# Altium PCB LNBF.PcbDoc
Units mil, origin at the board's own origin, x right, y up, seen from the top; angles counter-clockwise.
Board outline 6000 x 4000 mil, 2 copper layers (Top Layer, Bottom Layer); 9 components, 8 nets, 45 pads, 8 vias.
Unrouted connection lines stored in the file: 10.
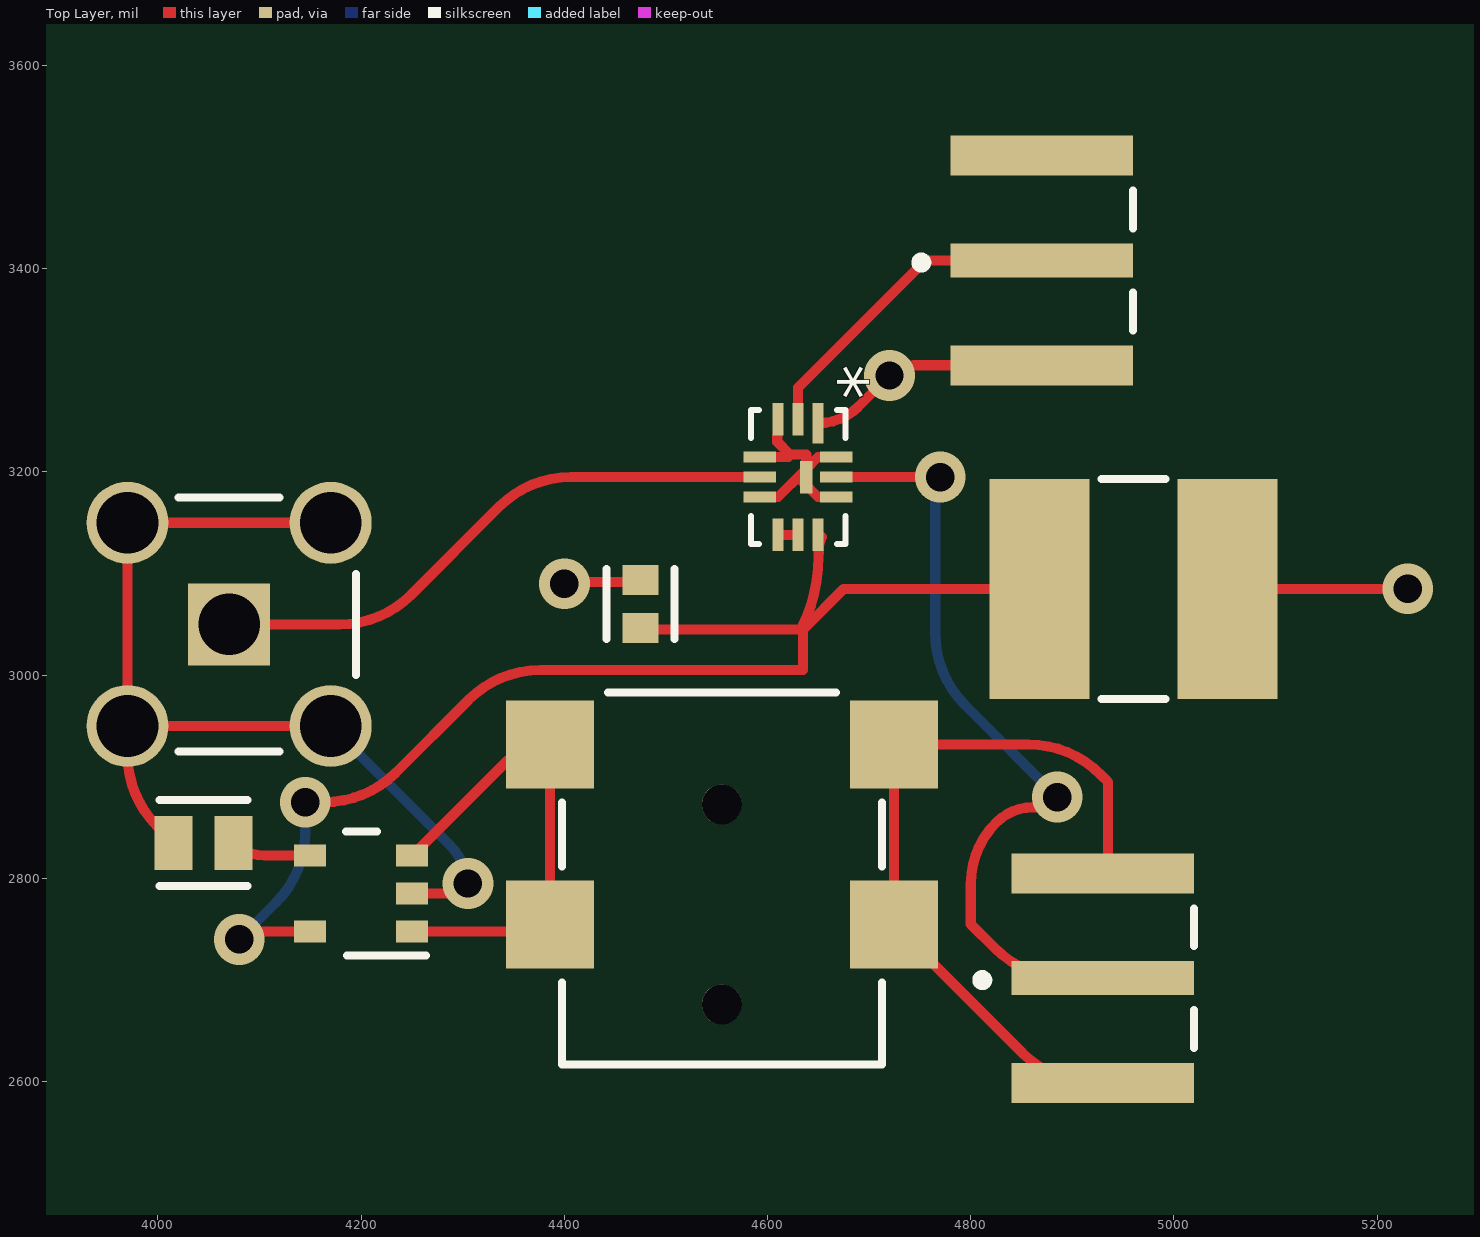
[diagram p0: Top Layer view]
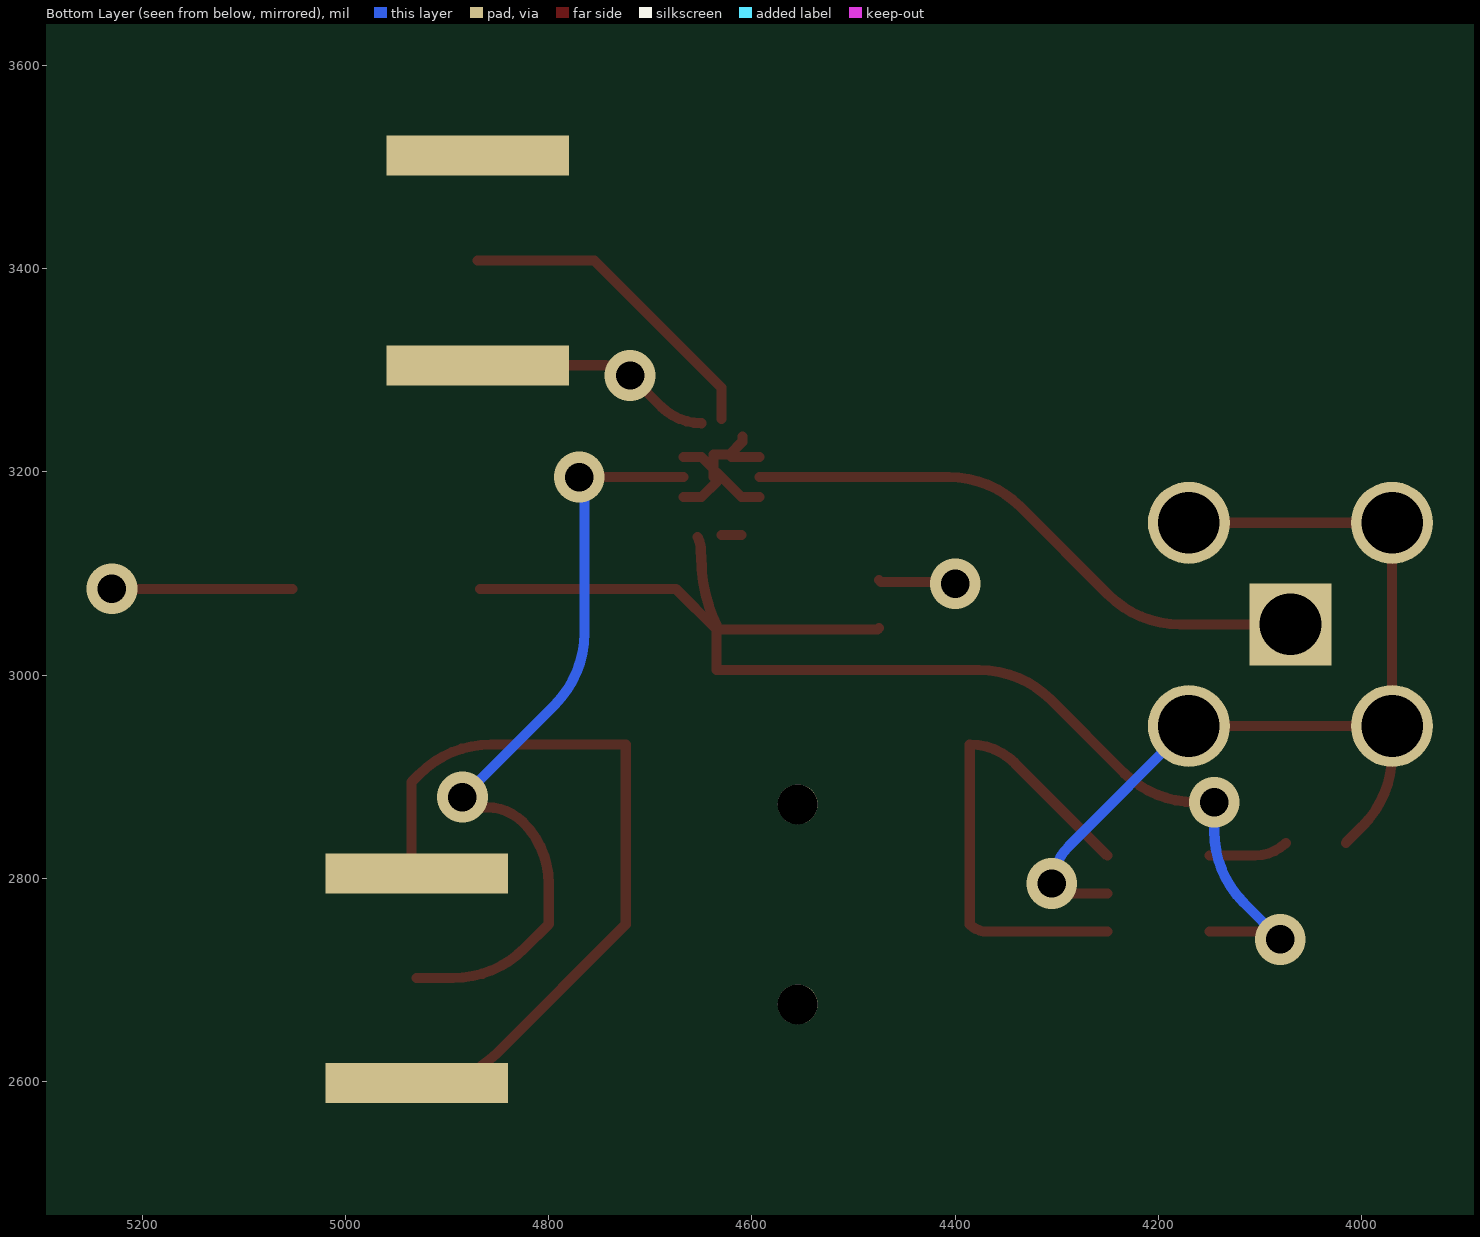
[diagram p1: Bottom Layer view, seen from below]
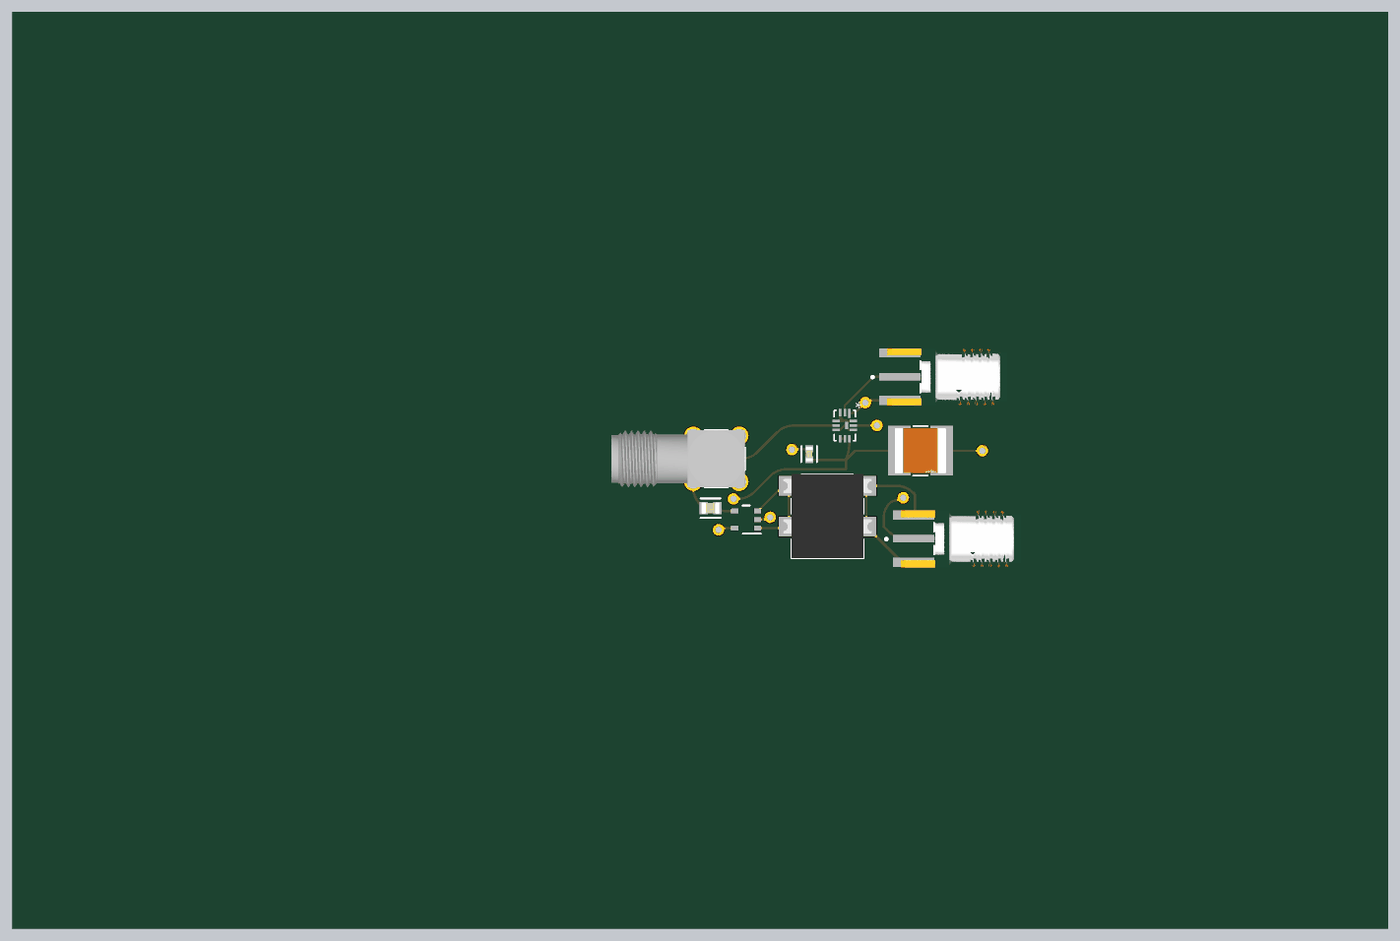
[diagram p2: 3D render of the assembled board from above, using the file's embedded part models]

## Layer stack, top to bottom
Top Solder: solder mask 0.4, Solder Resist, Dk 3.5
Top Layer: signal copper 1.4
Dielectric 1: dielectric 12.6, FR-4, Dk 4.8
Bottom Layer: signal copper 1.4
Bottom Solder: solder mask 0.4, Solder Resist, Dk 3.5

## Board outline
1000,1000 7000,1000 7000,5000 1000,5000

## Design rules (kind name [scope] priority, off if disabled: settings)
Clearance [All] p1: gap=10 ignorepadtopadclearanceinfootprint=FALSE
PolygonConnect [All] p1: connectstyle=Relief reliefconductorwidth=10 reliefentries=4 polygonreliefangle="90 Angle" airgapwidth=10
RoutingVias [All] p1: holewidth=28 width=50 viastyle="Through Hole" minholewidth=28 minwidth=50 maxholewidth=28 maxwidth=50
SolderMaskExpansion [All] p1: expansion=4 istentingtop=FALSE
Width [All] p1: maxlimit=10 minlimit=10 preferedwidth=10
30 further rules are at their usual default settings.

## Classes and differential pairs
component class LNBF: U?

## Components (designator, comment, footprint, x,y, rotation, side; value= is the part's Value field where it differs from the comment)
C1 "C0805C103K2RACTU" FP-C0805C-DN-MFG 4045,2835 r180 top value="10,000 pF"
J1 "OUT" FP-EMPCB_SMAFSTJ_B_HT-MFG 5146.77,3408.15 r270 top
J2 "SMA IN" MOLX-731000114_V 4070,3050 r0 top
J3 "EMPCB.SMAFSTJ.B.HT" FP-EMPCB_SMAFSTJ_B_HT-MFG 5206.77,2701.85 r270 top
J4 "694102107102" 694102107102 4555,2800 r0 top
U1 "LTC5549IUDB#TRMPBF" LTC5549IUDBTRMPBF_ADI 4630,3195 r270 top
? "Comment" FP-GRM55D-0_4-IPC_A 4960,3085 r0 top
? "Comment" FP-C0603C-CF-MFG 4475,3070 r90 top
? "Comment" DBV0005A_L 4200,2785 r180 top

## Footprints (in the part's own frame and the unit in brackets; to place one, negate y for a bottom-side part, rotate by r counter-clockwise, add the part's x,y. Pads: shape width x height; smd on the part's side, far side on the other; paste and mask are expansions set on the pad)
694102107102 [mm] "DC Power Jack Right Angled Low Profile SMT ?3.9 with 4 soldering pads & pegs"
  rect 2.2x2.2 smd: 1(-4.3,-1.15) 1(-4.3,3.35) 2(4.3,-1.15) 3(4.3,3.35)
  round 1 hole 1 unplated: MH1(0,1.85) MH2(0,-3.15)
  silkscreen extent -4,-4.65 4,4.65, body extent -4.9,-4.65 4.9,4.65, height 5.32
DBV0005A_L [mm]
  rect 0.8x0.55 smd paste+0 mask+0.051: 1(-1.275,0.95) 2(-1.275,0) 3(-1.275,-0.95) 4(1.275,-0.95) 5(1.275,0.95)
  silkscreen extent -1.63,-1.55 0.38,1.55
FP-C0603C-CF-MFG [mm]
  rect 0.75x0.9 smd paste+0 mask+0: 1(-0.6,0) 2(0.6,0)
  silkscreen extent -0.87,-0.85 0.88,0.85, body extent -1.2,-0.6 1.2,0.6, height 0.25
FP-C0805C-DN-MFG [mm]
  rect 0.95x1.35 smd paste+0 mask+0: 1(-0.75,0) 2(0.75,0)
  silkscreen extent -1.1,-1.07 1.1,1.07, body extent -1.4,-0.85 1.4,0.85, height 0.25
FP-EMPCB_SMAFSTJ_B_HT-MFG [mm]
  rect 0.85x4.56 smd paste+0 mask+0: 1(0,-7.03)
  rect 1x4.56 smd paste+0 mask+0: 2(-2.62,-7.03) 3(2.62,-7.03)
  rect 1x4.56 smd far side paste+0 mask+0: 4(-2.62,-7.03) 5(2.62,-7.03)
  silkscreen extent -1.75,-10.17 1.75,-4.75, body extent -3.32,-9.41 3.32,5.35, height 0.25
FP-GRM55D-0_4-IPC_A [mil]
  rect 98.51x216.66 smd paste+0 mask+0: 1(-92.54,0) 2(92.54,0)
  silkscreen extent -31,-108 31,108, body extent -161,-128 161,128, height 10
LTC5549IUDBTRMPBF_ADI [mil]
  rect 40x11 smd paste+0 mask+0: 1(-53,19.69)
  rect 32x11 smd paste+0 mask+0: 2(-57,0) 3(-57,-19.69) 7(57,-19.69) 8(57,0) 9(57,19.69)
  rect 11x32 smd paste+0 mask+0: 4(-19.69,-37.5) 5(0,-37.5) 6(19.69,-37.5) 10(19.69,37.5) 11(0,37.5) 12(-19.69,37.5)
  rect 32x12 smd paste+0 mask+0: 13(0,7.97)
  silkscreen extent -66,-47 66,47
MOLX-731000114_V [mm] "Connector, 5-Leads, Body 14.8x6.35mm, Pitch 2.54mm"
  rect 2.05x2.05 hole 1.54: 1(0,0)
  round 2.05 hole 1.54: 2(-2.54,2.54) 3(-2.54,-2.54) 4(2.54,-2.54) 5(2.54,2.54)
  silkscreen extent -1.26,-3.17 3.17,3.17, body extent -11.62,-3.17 3.18,3.18, height 9.57

## Part data
C1: library part CMP-2007-00259-2, "CAP CER 10000PF 200V X7R 0805", Capacitance="10,000 pF", Manufacturer=KEMET, Package=C0805C-DN, Temperature="-55°C to +125°C", Temperature Characteristic=X7R, Temperature Coefficient=30ppm/°C, Temperature Range High=+125°C, Temperature Range Low=-55°C, Tolerance=0.1, Voltage Rating="200 V", Automotive=No, Category=Cap, ComponentLink2Description=Datasheet, ComponentLink2URL=https://content.kemet.com/datasheets/KEM_C1003_C0G_SMD.pdf, Device Class L1="Passive Components", Device Class L2=Capacitors, Device Class L3="Ceramic Capacitors", Digikey Description="CAP CER 10000PF 200V X7R 0805", Height=0.88mm, Ipc Land Pattern Name=CAPC200125X78, Lead Free=Yes, Manufacturer Part Number=C0805C103K2RACTU, Material=Ceramic, Mouser Description="KEMET - C0805C103K2RACTU - CAP, MLCC, X7R, 10NF, 200V, 0805", Octopart=https://octopart.com/c0805c103k2ractu-kemet-9138347, RoHS=TRUE
J1: library part CMP-111093-000001-1, "CONN SMA JACK STR 50OHM EDGE MNT", Frequency=12.4GHz, Manufacturer="Taoglas Limited", Manufacturer Part Number=EMPCB.SMAFSTJ.B.HT, Package=0, Temperature="-40°C to +85°C", Temperature Range High=+85°C, Temperature Range Low=-40°C, Voltage Rating=335V, Automotive=No, Category=Conn, ComponentLink2Description=Datasheet, ComponentLink2URL=https://cdn.taoglas.com/datasheets/EMPCB.SMAFSTJ.B.HT.pdf, Conn Orientation=Horizontal, Contact Material=Gold, Device Class L1=Connectors, Device Class L2="RF / Coaxial Connectors", Device Class L3=unset, Digikey Description="CONN SMA JACK STR 50OHM EDGE MNT", Impedance=50Ω, Is Female=yes, Lead Free=Yes, Mouser Description="RF Connectors / Coaxial Connectors SMA Straight Edge Mount PCB Jack-Gold", Number Of Contacts=1, Octopart=https://octopart.com/empcb.smafstj.b.ht-taoglas-24204431, Pitch=2.62mm, RoHS=TRUE
J2: library part CMP-2000-05487-1, "SMA Right-Angle PCB Jack Receptacle, Brass Body, Gold Plated, 50 Ohm, 5-Pin THD, RoHS, Tray", Manufacturer=Molex, Package Description="5-Pin Through Hole Device, Body 14.8 x 6.35 mm, Pitch 2.54 mm", Package Reference=731000114, Datasheet URL=http://www.molex.com/webdocs/datasheets/pdf/en-us/0731000114_RF_COAX_CONNECTORS.pdf, Datasheet Version=09/2016, Manufacturer URL=http://www.molex.com/, Mounting Technology=ThroughHole, Package URL=http://www.molex.com/pdm_docs/sd/731000114_sd.pdf
J3: library part CMP-111093-000001-1, "CONN SMA JACK STR 50OHM EDGE MNT", Frequency=12.4GHz, Manufacturer="Taoglas Limited", Package=0, Temperature="-40°C to +85°C", Temperature Range High=+85°C, Temperature Range Low=-40°C, Voltage Rating=335V, Automotive=No, Category=Conn, ComponentLink2Description=Datasheet, ComponentLink2URL=https://cdn.taoglas.com/datasheets/EMPCB.SMAFSTJ.B.HT.pdf, Conn Orientation=Horizontal, Contact Material=Gold, Device Class L1=Connectors, Device Class L2="RF / Coaxial Connectors", Device Class L3=unset, Digikey Description="CONN SMA JACK STR 50OHM EDGE MNT", Impedance=50Ω, Is Female=yes, Lead Free=Yes, Manufacturer Part Number=EMPCB.SMAFSTJ.B.HT, Mouser Description="RF Connectors / Coaxial Connectors SMA Straight Edge Mount PCB Jack-Gold", Number Of Contacts=1, Octopart=https://octopart.com/empcb.smafstj.b.ht-taoglas-24204431, Pitch=2.62mm, RoHS=TRUE
J4: library part CMP-1502-00174-2, Color=Black, Current Rating=5A, Flammability Rating="UL94 V-0", Insulation Resistance=100MΩ, Max Operating Temperature=85°C, Min Operating Temperature=-40°C, Operating Supply Voltage=18V, Connector Type=Power, Contact Gender=Female, Contact Plating=Tin, Gender=Male, Housing Material=Polyamide, Mount="Surface Mount", NexarPartId=52645180, Packaging="Tape and Reel", REACH SVHC=Unknown, RoHS=Compliant, Shielding=Unshielded, Termination=SMD/SMT, Voltage Rating=18V, Voltage Rating (DC)=18V
U1: library part LTC5549IUDBTRMPBF, "No Description Available", Mfr_Name="Analog Devices Inc", Copyright="Copyright (C) 2024 Ultra Librarian. All rights reserved.", Manufacturer_Part_Number=LTC5549IUDB#TRMPBF, RefDes=RefDes, Type=DEV

## Via types
v1: diameter 50, hole 28, Top Layer to Bottom Layer, 8 vias

## Nets (pads, with @x,y where several pads share a name; then routed paths per layer and width w, separated by ;. In a path a pad name is that pad's centre, name@x,y a point inside that pad or via, vN(x,y) a via of type N, cw(c..) or ccw(c..) an arc to the next point about the centre after c; other vN are vias at no path point)
GND: ?.2 C1.2 J1.2 J1.3 J1.4 J1.5 J2.2 J2.3 J2.4 J2.5 J3.2 J3.3 J3.4 J3.5 J4.2 J4.3 U1.1 U1.3 U1.4 U1.6 U1.10 U1.12 U1.13 | length 2470.2
  Top Layer w10: C1.2 3999.29,2851.18 cw(c4070,2921.89) 3970,2921.89 J2.3 ; J2.4 J2.3 ; J2.5 J2.2 J2.3 ; ?.2@4250.2,2785 4280.86,2785 ccw(c4280.86,2819.14) v1(4305,2795) ; v1(4400,3090) 4401.81,3091.81 4473.19,3091.81 ?.2@4475,3093.62 ; U1.6 4610.31,3175.31 U1.13@4633.98,3198.98 ; U1.4 4620.31,3214.69 ; 4609.5,3235 4609.5,3229.79 4622.03,3217.26 4637.97,3217.26 U1.13@4637.97,3202.97 ; U1.13@4633.98,3191.02 4649.69,3175.31 U1.10 ; U1.13 U1.13@4637.97,3202.97 ; U1.1 ccw(c4649.69,3304.28) 4689.48,3264.48 v1(4720,3295) cw(c4744.14,3270.86) 4744.14,3305 J1.3 ; U1.12 4649.69,3214.69 U1.13@4637.97,3202.97 ; J3.3 4921.74,2598.7 cw(c4921.74,2698.7) 4851.03,2627.99 J4.2 J4.3 4856.69,2931.89 cw(c4856.69,2831.89) 4927.4,2902.6 4935,2895 4935,2817.07 cw(c4917.93,2817.07) J3.2 ; ?.2@5052.54,3085 v1(5230,3085)
  Bottom Layer w10: J2.4 4287.32,2832.68 cw(c4244.64,2790) 4305,2790 v1(4305,2795)
NetC1_1: ?.4 C1.1 | length 78.6
  Top Layer w10: C1.1 ccw(c4104.94,2865.42) 4104.94,2822.4 ?.4
NetJ1_1: J1.1 U1.2 | length 322.8
  Top Layer w10: U1.2 4630,3283 4755.15,3408.15 J1.1
NetJ2_1: J2.1 U1.5 | length 574
  Top Layer w10: J2.1 4178.58,3050 ccw(c4178.58,3150) 4249.29,3079.29 4335.71,3165.71 cw(c4406.42,3095) 4406.42,3195 U1.5
NetJ3_1: J3.1 U1.11 | length 773.4
  Top Layer w10: U1.11 4688.43,3195 ; 4688.36,3195 ccw(c4688.43,3205) 4688.43,3195 ; v1(4770,3195) 4688.43,3195 ; v1@4875,2870 4861.21,2870 ccw(c4861.21,2818.79) 4825,2855 ccw(c4885.36,2794.64) 4800,2794.64 4800,2755 4823.86,2731.14 ccw(c4894.57,2801.85) 4894.57,2701.85 J3.1
  Bottom Layer w10: v1(4770,3195) 4765,3190 4765,3041.42 ccw(c4865,3041.42) 4794.29,2970.71 v1(4885,2880)
NetJ4_1: ?.1@4250.2,2747.6 ?.3 J4.1 | length 492.7
  Top Layer w10: ?.1@4250.2,2747.6 4368.5,2747.6 ccw(c4368.5,2771.94) 4385.71,2754.73 4385.71,2931.89 ccw(c4385.71,2869.07) 4341.29,2913.49 ?.3
NetU1_7: U1.7 U1.8 | length 19.7
  Top Layer w10: U1.7 U1.8
VCC: ?.1@4475,3046.38 ?.1@4867.46,3085 U1.9 | length 802.4
  Top Layer w10: 4376.42,3005 4635,3005 4635,3045 ; ?.1@4475,3046.38 4476.38,3045 4633.08,3045 ; U1.9@4653.57,3136.07 ccw(c4684.14,3120.86) 4650.7,3127.72 ccw(c4660.5,3125.75) 4650.5,3125.79 4650.5,3122 cw(c4635.5,3122) 4650.19,3118.98 ccw(c4660,3117.03) 4650,3117.07 cw(c4488.08,3117.07) 4633.08,3045 ; ?.1@4867.46,3085 4675,3085 4635,3045 ; 4633.08,3045 4635,3045
pads on no net: ?.5 J4.MH1 J4.MH2
copper on no net: | length 511.3
  Top Layer w10: v1(4080,2740) cw(c4092.07,2740) 4083.54,2748.54 4085,2750 ccw(c4090.8,2755.8) 4090.8,2747.6 4149.8,2747.6 ; v1(4145,2875) 4163.58,2875 ccw(c4163.58,2975) 4234.29,2904.29 4305.71,2975.71 cw(c4376.42,2905) 4376.42,3005
  Bottom Layer w10: v1(4080,2740) 4115.71,2775.71 ccw(c4045,2846.42) 4145,2846.42 v1(4145,2875)

## Text inside footprints (layer, text, board x,y; h text height)
U1: Top 3D Body "*" at 4601.5,3248.5 h50 r270; Top Overlay "*" at 4649.53,3305.5 h50 r270